# Allegro board FRIGE DOOR ALARM.brd
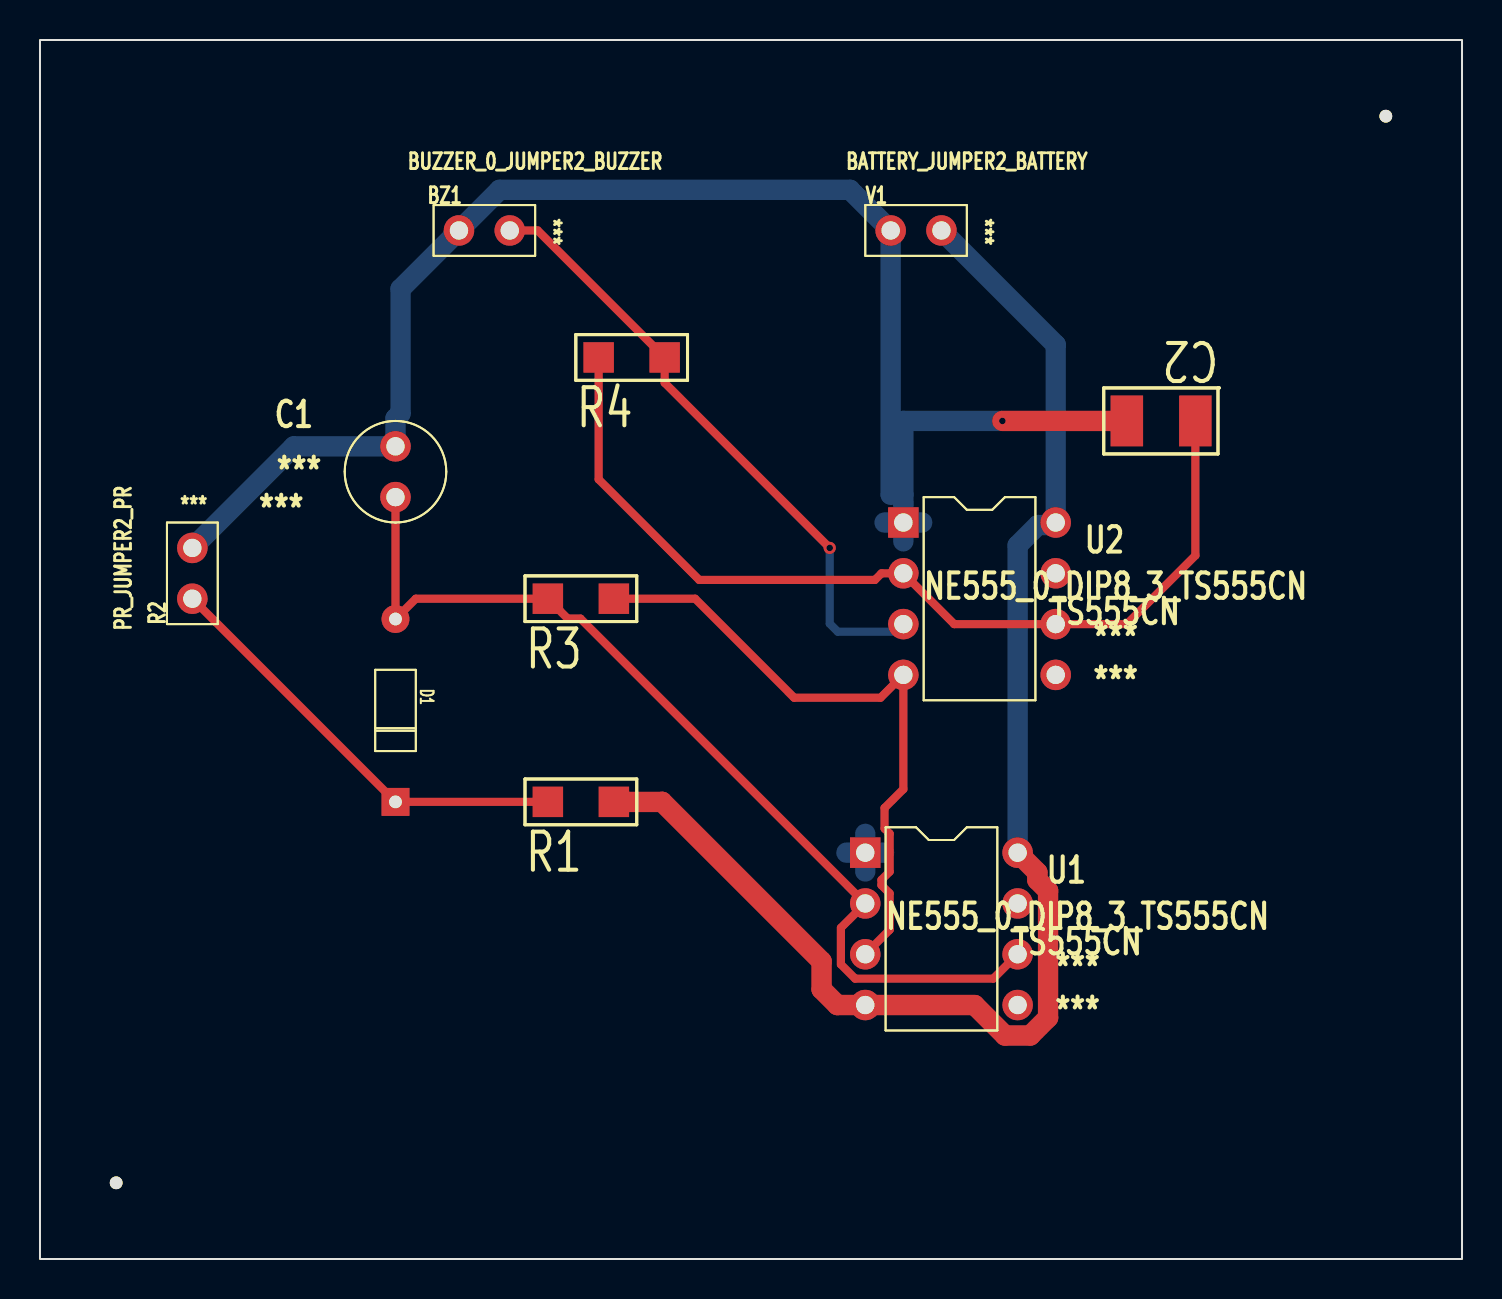
[diagram p0: board, top side]
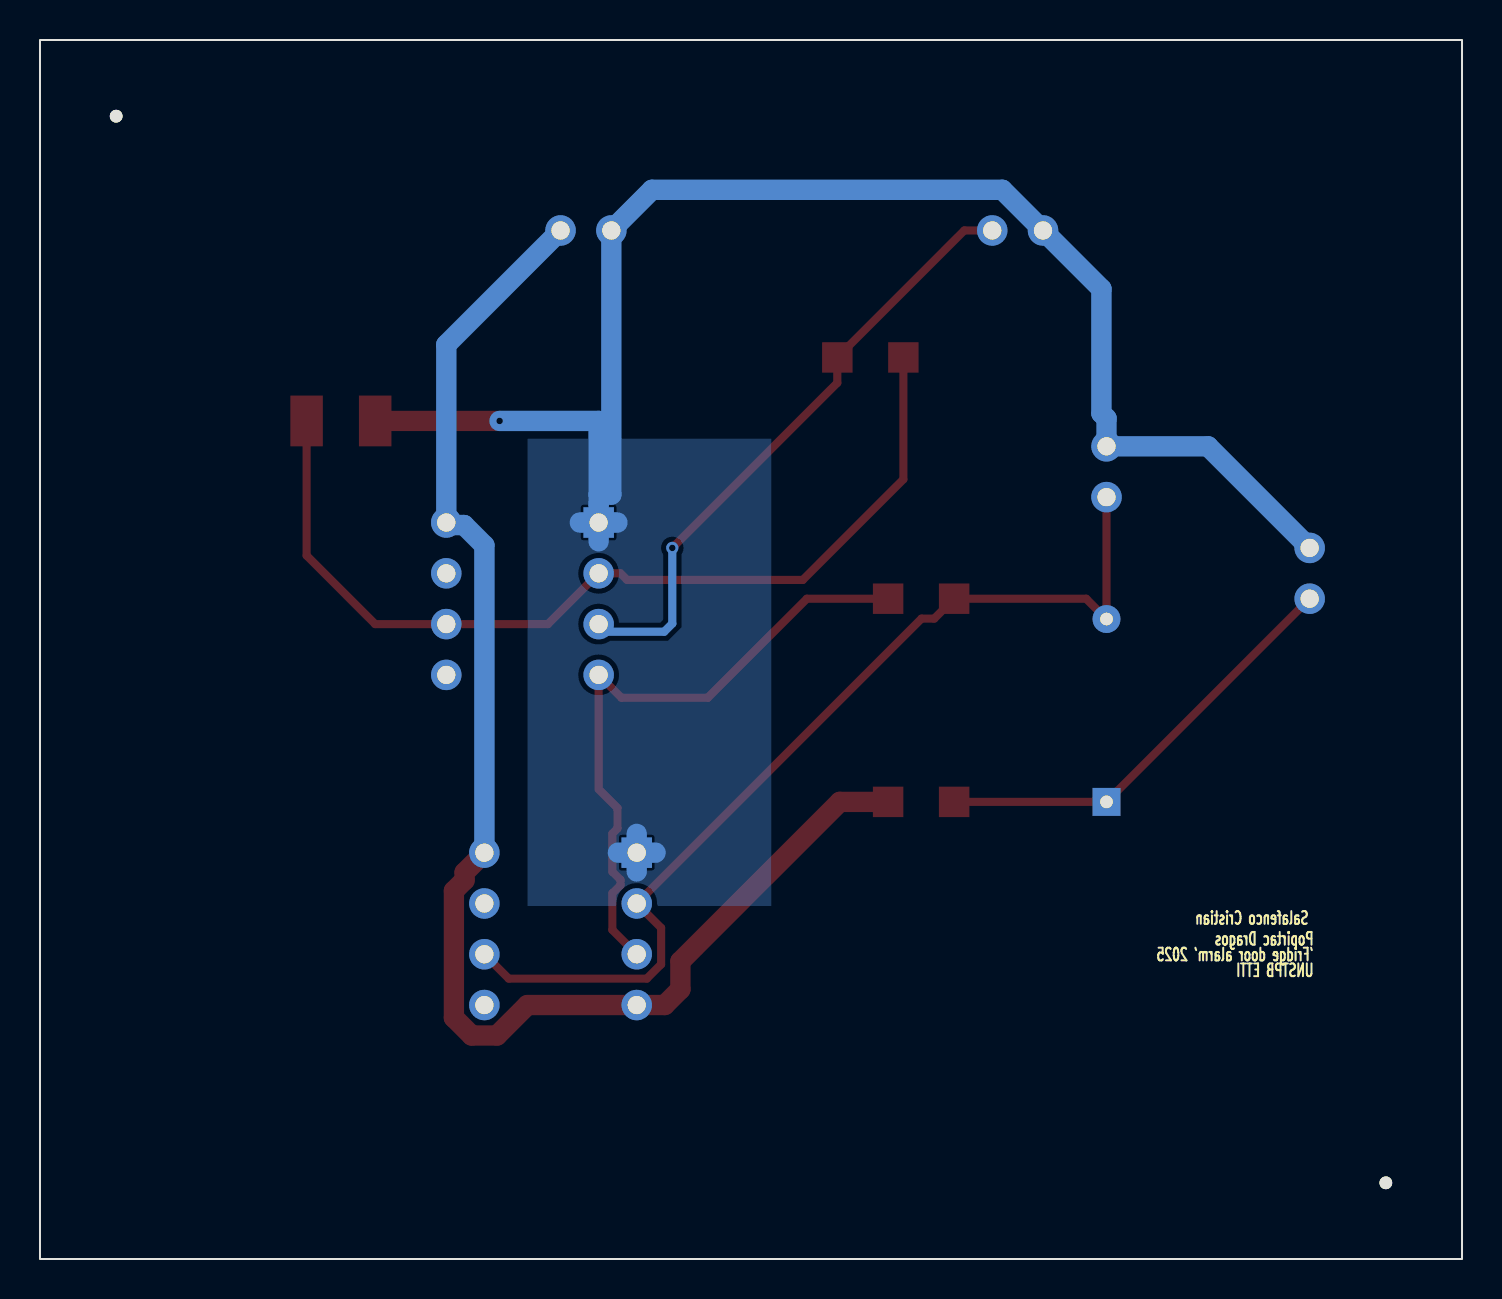
[diagram p1: board, bottom side, seen from below]

Outline 71.12 x 60.96 mm; copper layers: TOP, BOTTOM. Coordinates in mm from the lower left corner of the outline.
Outline path: rectangle 0,0 71.12,60.96

## Design rules (mm)
nets with their own width: min track width 0.406; nets N00198 N00434 N01723 N01784 N01833
nets with their own width: min track width 1.016; nets N00360 N00977

## Placement (name value [footprint] x y rotation side)
BZ1  Buzzer  [JUMPER2]  20.95 51.44 0 top
C1  10u  [CAP196]  17.78 38.1 0 top
C2  100n  [SMC1210]  57.78 41.91 180 top
D1  D1N4148  [DO35]  17.78 22.86 0 top
NOREF  -  [unnamed]  67.31 57.15 0 top
NOREF#2  -  [unnamed]  3.81 3.81 0 top
R1  10k  [SMR1206]  25.4 22.86 0 top
R2  PR  [JUMPER2]  7.62 33.02 90 top
R3  2M2  [SMR1206]  25.4 33.02 0 top
R4  1M  [SMR1206]  27.94 45.09 0 top
U1  TS555CN  [DIP8_3]  41.27 20.32 0 top
U2  TS555CN  [DIP8_3]  43.18 36.83 0 top
V1  Battery  [JUMPER2]  42.55 51.44 0 top

## Library data of the parts
BZ1 = Buzzer_0: User Part Number: ***
C1 = CapElec: Tolerance: ***; User Part Number: ***
C2 = CapElec
D1 = D1N4148
R1 R3 R4 = R
R2 = PR: User Part Number: ***
U1 U2 = NE555_0: Tolerance: ***; User Part Number: ***
V1 = Battery: User Part Number: ***

## Footprints (pads in the part's own frame, mm; a bottom-side part is the same pattern mirrored in y, then rotated)
CAP196
  round 1.524 hole 0.914: 1(0,0) 2(0,2.54)
DIP8_3
  rect 1.524x1.524 hole 0.914: 1(0,0)
  round 1.524 hole 0.914: 2(0,-2.54) 3(0,-5.08) 4(0,-7.62) 5(7.62,-7.62) 6(7.62,-5.08) 7(7.62,-2.54) 8(7.62,0)
DO35
  rect 1.397x1.397 hole 0.635: 1(0,0)
  round 1.397 hole 0.635: 2(0,9.144)
JUMPER2
  round 1.524 hole 0.914: 1(0,0) 2(2.54,0)
SMC1210
  rect 1.626x2.54 smd: 1(0,0) 2(3.429,0)
SMR1206
  rect 1.524x1.524 smd: 1(0,0) 2(3.302,0)
unnamed
  round 0.635 hole 3.175 unplated: (0,0)

## Nets
N00198: D1.1 R1.1 R2.1
N00360: BZ1.1 C1.2 C2.2 R2.2 U1.1 U2.1 V1.1
N00434: C1.1 D1.2 R3.1 U1.2 U1.6
N00977: R1.2 U1.4 U1.8(VCC) U2.8(VCC) V1.2
N01723: R3.2 U1.3 U2.4
N01784: C2.1 R4.1 U2.2 U2.6
N01833: BZ1.2 R4.2 U2.3

Pads without a net: U1 5 7; U2 5 7

## Via types
v1: diameter 0.61, hole 0.33, TOP to BOTTOM, 2 vias

## Routing (per net, layer and track width the routed paths; a pad name or vN(x,y) marks a point on that pad's centre or on a via; arc(x,y) is an arc through that point)
N00198: length 22
  TOP w0.406: R2.1 D1.1 R1.1
N00360: length 84.3
  TOP w1.016: C2.2 v1(48.13,41.91)
  BOTTOM w1.016: 43.18,38.23 U2.1 ; 43.18,38.23 42.55,38.23 V1.1 40.51,53.47 22.99,53.47 BZ1.1 18.03,48.51 18.03,42.29 17.78,42.04 C1.2 12.7,40.64 R2.2 ; 43.18,38.23 43.18,41.91 v1(48.13,41.91) ; 43.18,35.89 U2.1 ; U2.1 44.12,36.83 ; U2.1 42.24,36.83 ; U1.1 42.22,20.32 ; U1.1 41.27,19.38 ; U1.1 40.33,20.32 ; U1.1 41.27,21.26
N00434: length 49.5
  TOP w0.406: 48.9,15.24 47.68,14.02 40.77,14.02 40.06,14.73 40.06,16.56 U1.2 27.03,32.02 26.4,32.02 R3.1 18.8,33.02 D1.2 C1.1
N00977: length 71.3
  TOP w1.016: 48.9,20.32 49.88,19.33 49.88,18.95 50.42,18.41 50.42,12.07 49.53,11.18 48.26,11.18 46.74,12.7 U1.4 39.88,12.7 39.09,13.49 39.09,14.88 31.11,22.86 R1.2
  BOTTOM w1.016: 48.9,20.32 48.9,35.69 49.91,36.7 50.67,36.7 U2.8 50.8,45.72 V1.2
N01723: length 32.3
  TOP w0.406: U1.3 42.49,16.46 42.49,18.29 42.09,18.69 42.09,18.96 42.49,19.37 42.49,21.27 42.24,21.53 42.24,22.56 43.18,23.5 U2.4 42.04,28.07 37.72,28.07 32.77,33.02 R3.2
N01784: length 47.4
  TOP w0.406: R4.1 27.94,38.99 32.97,33.96 41.76,33.96 42.09,34.29 U2.2 45.72,31.75 U2.6 54.36,31.75 57.78,35.18 C2.1
N01833: length 31.1
  TOP w0.406: v1(39.5,35.56) 31.24,43.81 R4.2 24.89,51.44 23.5,51.44
  BOTTOM w0.406: v1(39.5,35.56) 39.5,31.78 39.9,31.37 42.8,31.37 U2.3

## Copper pours and planes (outline as drawn; the poured copper is in the pictures)
N00360 on BOTTOM: 34.54,41.02 34.54,17.65 46.74,17.65 46.74,41.02

## Text on the board
Ref Des/Silkscreen Bottom: Popirtac Dragos | 'Fridge door alarm' 2025 | UNSTPB ETTI | Salafenco Cristian
XSECTION_CHART: *  SURFACE | L1 TOP CONDUCTOR | *  DIELECTRIC | L2 BOTTOM CONDUCTOR | DESIGN CROSS SECTION CHART | ___________________________ | TOTAL THICKNESS 10.4 MIL | 1-2
DEVICE_TYPE_TOP: FIGURE | FINISHED_SIZE | 13.0 | 25.0 | 36.0 | 125.0 | DRILL CHART: TOP to BOTTOM | ALL UNITS ARE IN MILS | PLATED | NON-PLATED | QTY | 1 | 2 | 24 | 29 | TOTAL HOLES:
